# EAGLE board 5v_power_supply (EAGLE 6.5.0)
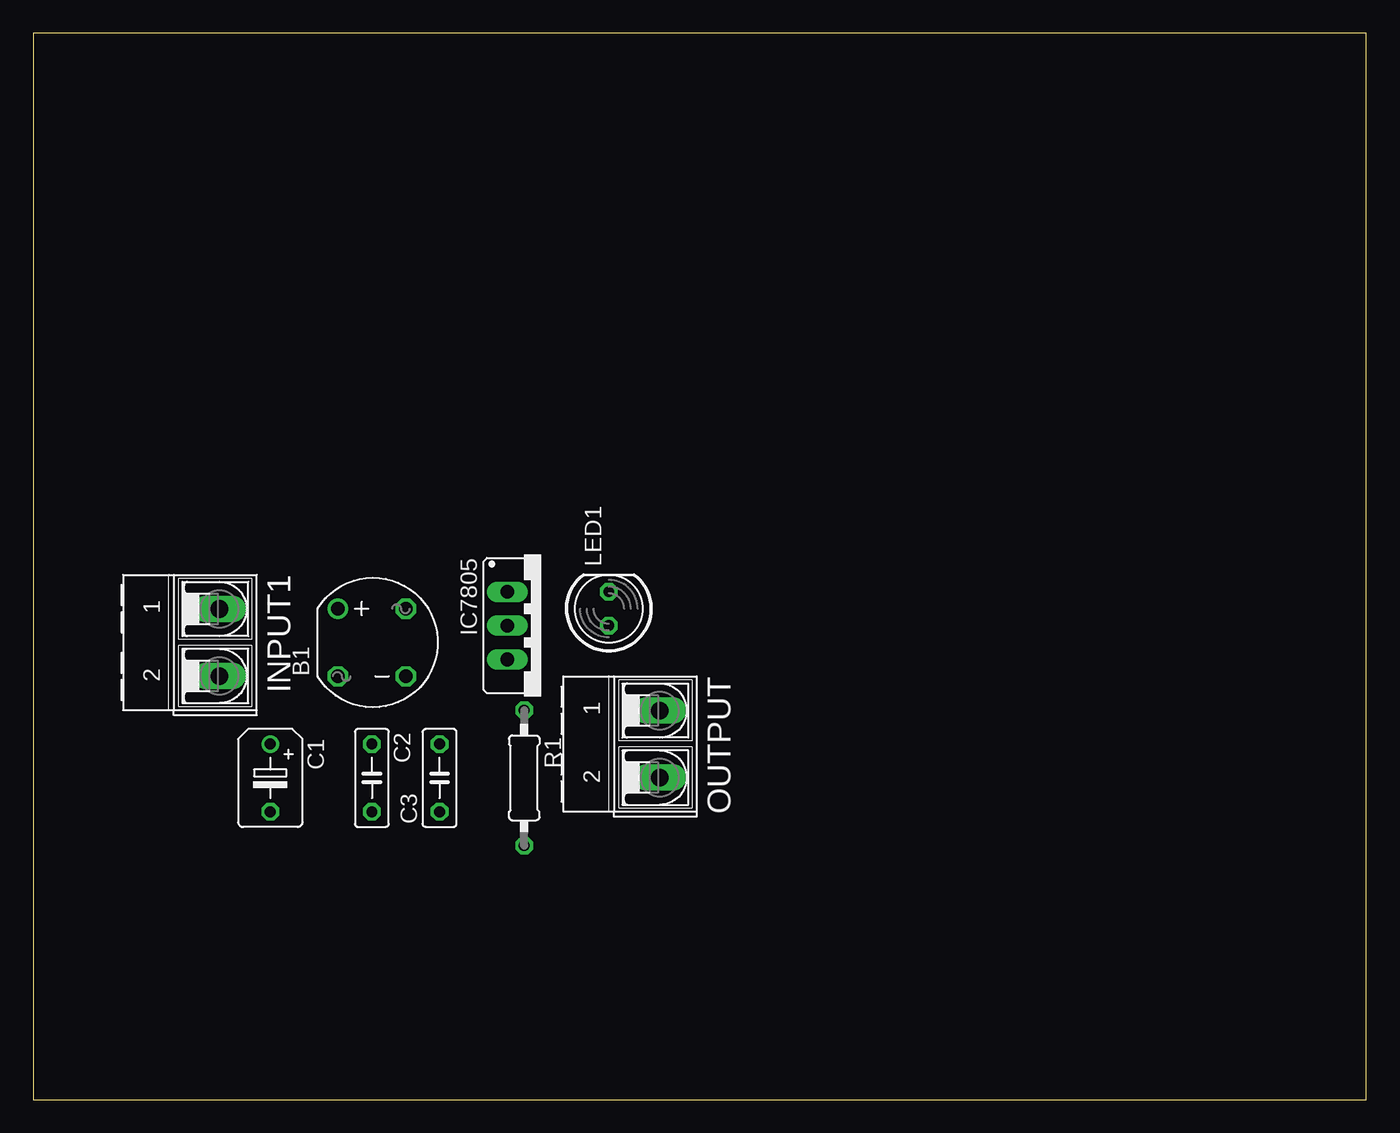
[diagram p0: board, top side]
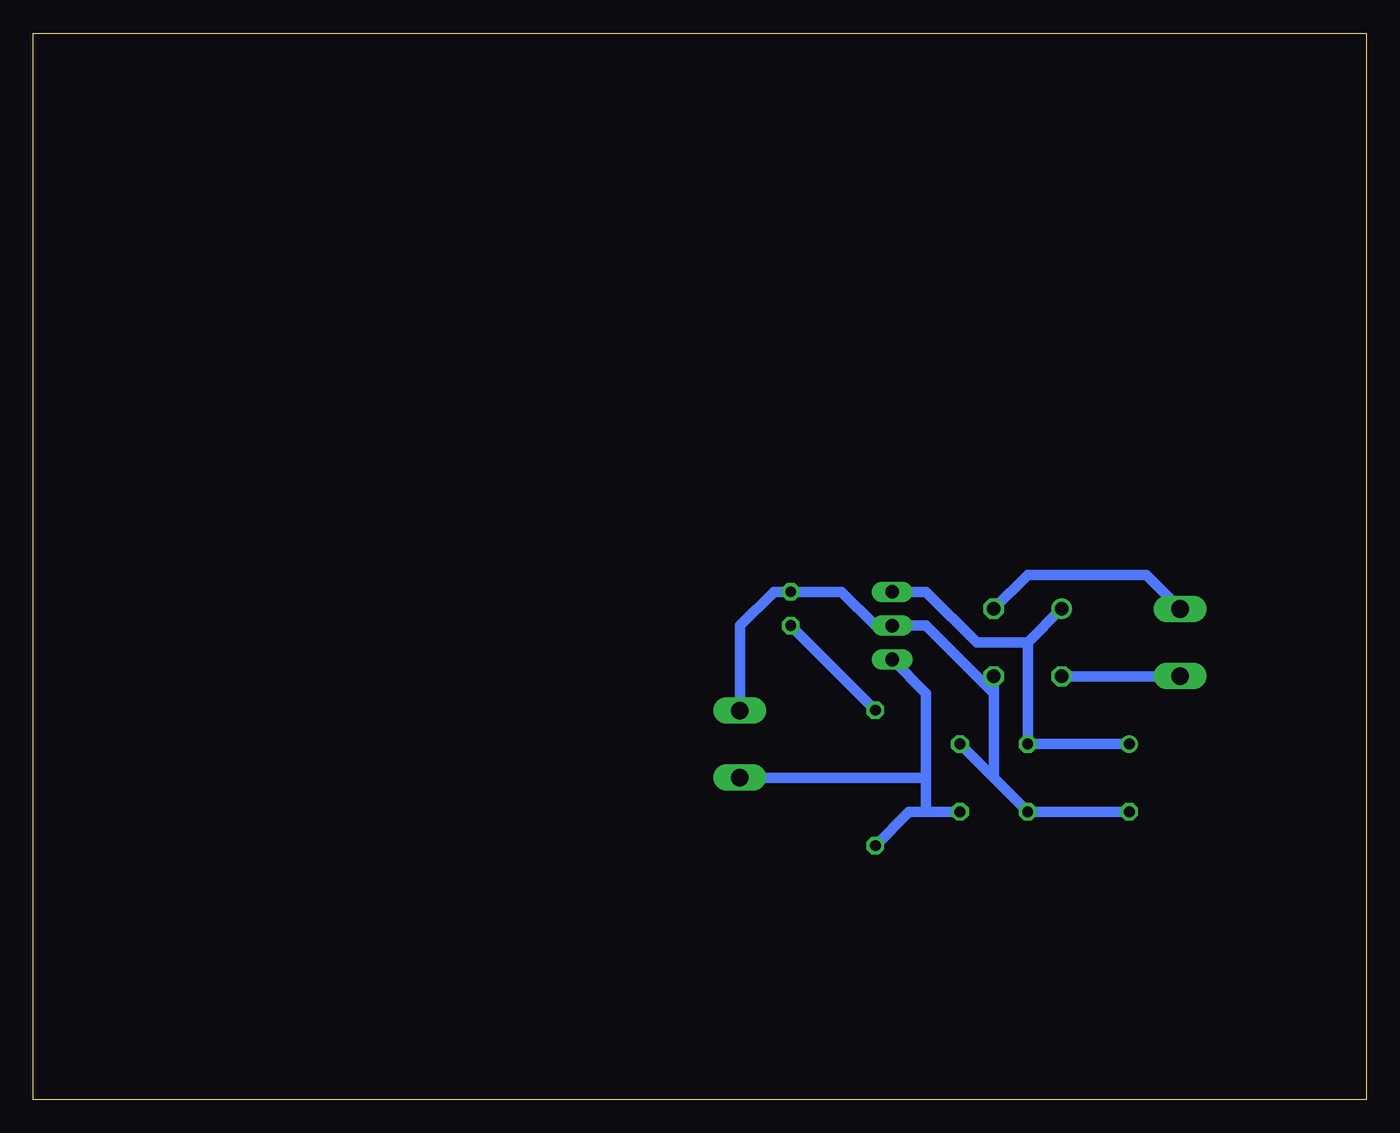
[diagram p1: board, bottom side, seen from below]

Size 100 x 80 mm. Coordinates in mm from the lower left corner, seen from the top.
Outline: 0,0 100,0 100,80 0,80 0,0
Copper layers (1*16): Top 0.035mm / dielectric 1.5mm / Bottom 0.035mm
Design rules "default *": minimum track width 0.8mm, minimum drill 0.8mm, track to track 0.8mm, track to pad 0.8mm, pad to pad 8mil, via to via 8mil, smd to smd 8mil, copper to edge 40mil, drill to drill 8mil, minimum pad ring 10mil, minimum via ring 8mil, stop-mask expansion 4mil, vias tented up to drill 0mil, thermal gap 10mil

## Footprints (pad centres in the part's own frame; a part is rotated, then mirrored left to right if it is on the bottom)
RB1A = drill 1.016: + -2.54,2.54 | drill 1.016 octagon: - 2.54,-2.54; AC1 2.54,2.54; AC2 -2.54,-2.54
B45181B = drill 0.813: + -2.54,0 | drill 0.813 octagon: - 2.54,0
C050-025X075 = drill 0.813 octagon: 1 -2.54,0; 2 2.54,0
78XXS = drill 1.016 long: GND 0,-2.54; IN -2.54,-2.54; OUT 2.54,-2.54
AK500/2-H = drill 1.321 long: 1 -2.515,0; 2 2.515,0
LED5MM = drill 0.813 octagon: A -1.27,0; K 1.27,0
0207/10 = drill 0.813 octagon: 1 -5.08,0; 2 5.08,0

## Placement (x,y rotation side)
B1  [RB1A]  25.4,34.29 0 top
C1  470uF  [B45181B]  17.78,24.13 270 top
C2  0.1uF  [C050-025X075]  25.4,24.13 270 top
C3  0.1uF  [C050-025X075]  30.48,24.13 90 top
IC7805  [78XXS]  38.1,35.56 270 top
INPUT1  [AK500/2-H]  13.97,34.29 270 top
LED1  [LED5MM]  43.18,36.83 90 top
OUTPUT  [AK500/2-H]  46.99,26.67 270 top
R1  1k  [0207/10]  36.83,24.13 270 top

## Library data of the parts
B1 = rectifier
C1-C3 R1 = rcl
IC7805 = v-reg
INPUT1 OUTPUT = con-ptr500; OC_FARNELL: unknown; OC_NEWARK: unknown
LED1 = led

## Nets
N$1: B1.AC1 INPUT1.1
N$2: B1.AC2 INPUT1.2
N$3: B1.+ C1.+ C2.1 IC7805.IN
N$4: B1.- C1.- C2.2 C3.2 IC7805.GND LED1.K OUTPUT.1
N$7: C3.1 IC7805.OUT OUTPUT.2 R1.2
N$8: LED1.A R1.1

## Tracks (layer width: path | path; a pad name or v marks a point on that pad's centre or on a via)
N$1
  Bottom 0.8: B1.AC1 25.4,39.37 16.51,39.37 13.97,36.83 INPUT1.1
N$2
  Bottom 0.8: B1.AC2 13.97,31.75 INPUT1.2
N$3
  Bottom 0.8: C1.+ C2.1 25.4,34.29 | 25.4,34.29 B1.+ | IC7805.IN 33.02,38.1 29.21,34.29 25.4,34.29
N$4
  Bottom 0.8: OUTPUT.1 46.99,35.56 44.45,38.1 LED1.K 39.37,38.1 36.83,35.56 IC7805.GND 33.02,35.56 27.94,30.48 | C1.- C2.2 27.94,24.13 | 27.94,24.13 C3.2 | 27.94,24.13 27.94,30.48 | 27.94,30.48 B1.-
N$7
  Bottom 0.8: 33.02,21.59 34.29,21.59 R1.2 | 33.02,21.59 C3.1 | IC7805.OUT 33.02,30.48 33.02,24.13 | 33.02,21.59 33.02,24.13 | 33.02,24.13 46.99,24.13 OUTPUT.2
N$8
  Bottom 0.8: LED1.A R1.1